# EAGLE board working (EAGLE 6.4)
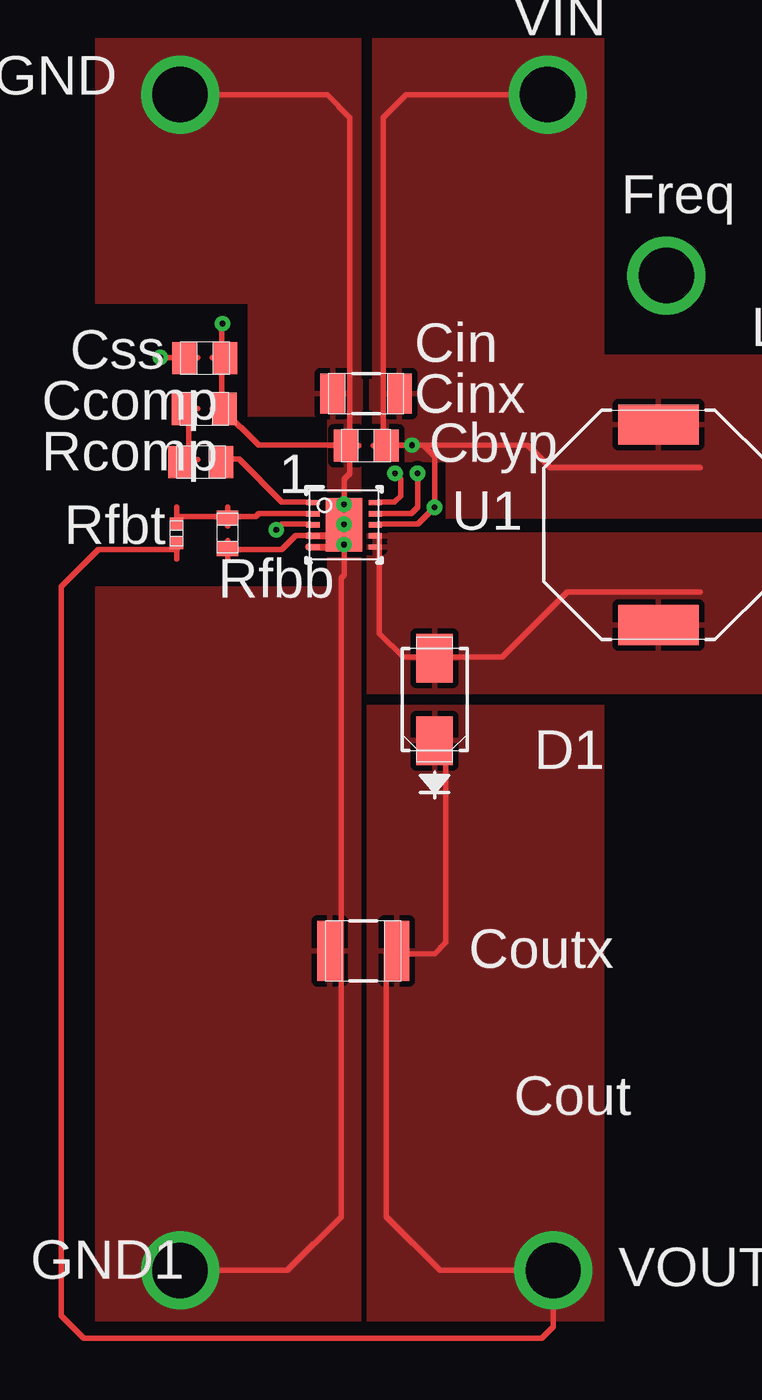
[diagram p0: board, top side]
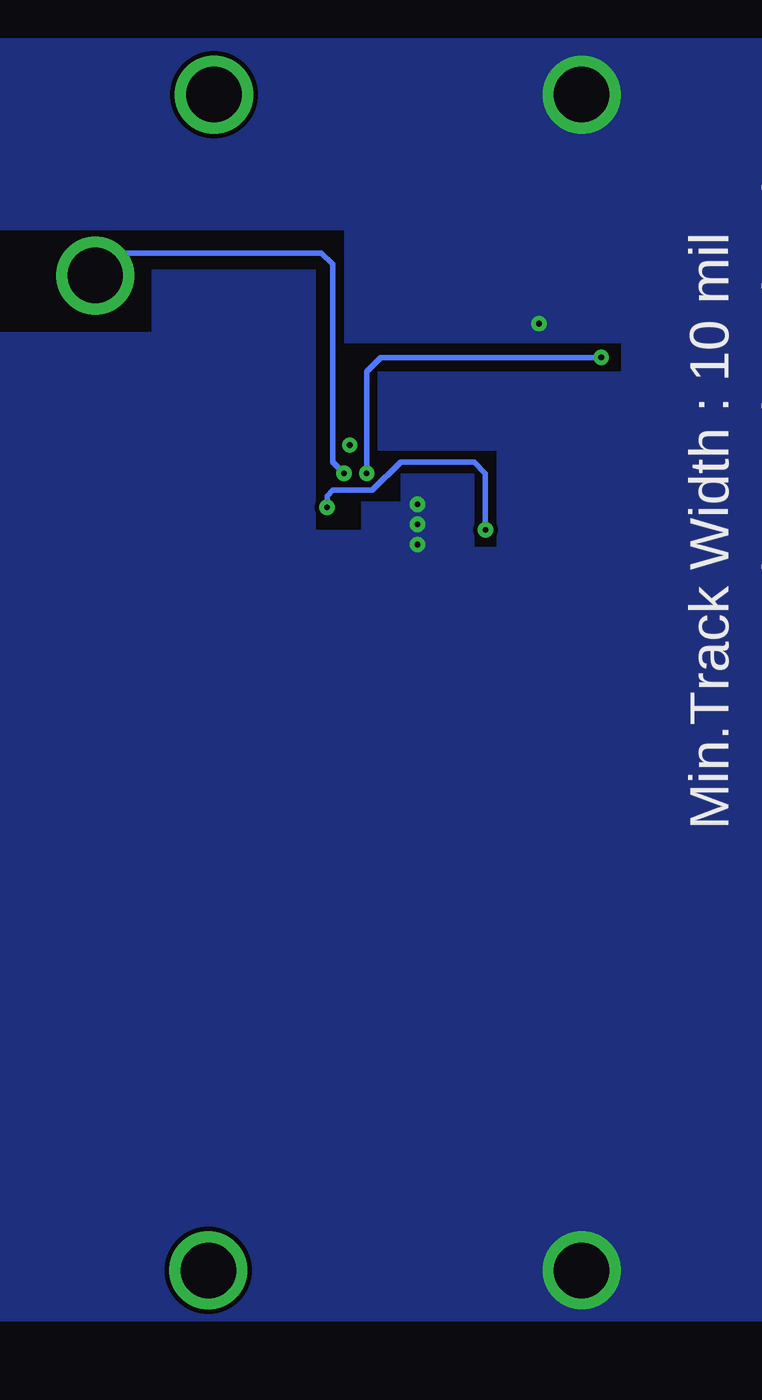
[diagram p1: board, bottom side, seen from below]

No outline drawn. Coordinates in mm, seen from the top.
Copper layers ((1*2)+(15*16)): TOP / INTERNAL1 / layer 15 / BOTTOM

## Footprints (pad centres in the part's own frame; a part is rotated, then mirrored left to right if it is on the bottom)
0805 = smd 1.118 x 1.448: 1 -0.902,0; 2 0.902,0
1206 = smd 1.118 x 1.803: 1 -1.499,0; 2 1.499,0
1210 = smd 1.118 x 2.692: 1 -1.499,0; 2 1.499,0
SMA = smd 2.184 x 1.626: 1 -1.854,0; 2 1.854,0
TP-1502 = drill 0.813 round: 1 0,0
SRU1048 = smd 1.803 x 3.607: 1 -4.496,0; 2 4.496,0
0603 = smd 0.66 x 0.965: 1 -0.699,0; 2 0.699,0
0402 = smd 0.559 x 0.61: 1 -0.419,0; 2 0.419,0
DRC0010A = smd 0.6 x 0.24: 1 -1.4,1; 2 -1.4,0.5; 3 -1.4,0; 4 -1.4,-0.5; 5 -1.4,-1; 6 1.4,-1; 7 1.4,-0.5; 8 1.4,0; 9 1.4,0.5; 10 1.4,1 | smd 1.65 x 2.4: 11 0,0

## Placement (x,y rotation side)
Cbyp  [0805]  45.19,66.01 180 top
Ccomp  [0805]  37.92,67.67 0 top
Cin  [1206]  45.19,68.35 180 top
Cout  [1210]  45.06,43.31 180 top
Css  [0805]  37.95,69.95 0 top
D1  [SMA]  48.26,54.61 90 top
Freq  [TP-1502]  58.65,73.63 0 top
GND  [TP-1502]  36.78,81.76 0 top
GND1  [TP-1502]  36.78,28.91 0 top
L1  [SRU1048]  58.32,62.46 270 top
Rcomp  [0805]  37.77,65.28 180 top
Rfbb  [0603]  38.96,62.08 270 top
Rfbt  [0402]  36.68,62.08 90 top
U1  [DRC0010A]  44.2,62.46 0 top
VIN  [TP-1502]  53.31,81.76 0 top
VOUT  [TP-1502]  53.54,28.91 0 top

## Library data of the parts
Cbyp = ultra-librarian; RefDes: Cbyp; Type: GRM21BR61C105KA01L
Ccomp = ultra-librarian; RefDes: Ccomp; Type: CC0805KRX7R9BB821
Cin = ultra-librarian; RefDes: Cin; Type: GRM31CR61A226KE19L
Cout = ultra-librarian; RefDes: Cout; Type: GRM32ER61C476ME15L
Css = ultra-librarian; RefDes: Css; Type: 08053C104KAT2A
D1 = ultra-librarian; RefDes: D1; Type: B340LA-13-F
Freq = ultra-librarian; RefDes: Freq; Type: TP-1502
GND = ultra-librarian; RefDes: GND; Type: TP-1502
GND1 = ultra-librarian; RefDes: GND1; Type: TP-1502
L1 = ultra-librarian; RefDes: L1; Type: SRU1048-4R7Y
Rcomp = ultra-librarian; RefDes: Rcomp; Type: ERJ-6ENF5762V
Rfbb = ultra-librarian; RefDes: Rfbb; Type: RC0603FR-0739KL
Rfbt = ultra-librarian; RefDes: Rfbt; Type: CRCW0402150KFKED
U1 = ultra-librarian; RefDes: U1; Type: TPS61087QDRCRQ1
VIN = ultra-librarian; RefDes: VIN; Type: TP-1502
VOUT = ultra-librarian; RefDes: VOUT; Type: TP-1502

## Nets
0: Cbyp.2 Ccomp.2 Cin.2 Cout.2 Css.2 GND1.1 GND.1 Rfbb.2 U1.4 U1.5 U1.11
1: Cbyp.1 Cin.1 L1.1 U1.3 U1.8 VIN.1
2: Cout.1 D1.1 Rfbt.1 VOUT.1
4: D1.2 L1.2 U1.6 U1.7
5: Rcomp.1 U1.1
6: Rfbb.1 Rfbt.2 U1.2
7: Ccomp.1 Rcomp.2
13: Freq.1 U1.9
14: Css.1 U1.10

## Tracks (layer width: path | path; a pad name or v marks a point on that pad's centre or on a via)
0  (via drill 0.25 pad 0.69, 2.49 pad 3.48)
  TOP 0.254: v44.2,61.57 44.2,60.2 44.07,60.07 44.07,43.18 44.07,36.45 44.07,31.37 41.66,28.96 v36.83,28.96 | 42.6,61.98 42.04,61.98 41.4,61.34 38.99,61.34 | 38.71,71.48 38.71,69.98 38.71,67.69 40.36,66.04 44.45,66.04 | v44.2,63.37 44.2,64.52 44.45,64.77 44.45,66.04 | v36.83,81.79 43.43,81.79 44.45,80.75 44.45,70.61 44.45,68.33 44.45,66.04 | 44.02,66.03 44.86,66.03 | 38.28,69.96 39.12,69.96 | 38.28,67.68 39.12,67.68 | 38.98,60.91 38.98,61.75
  TOP 0.305: 42.6,61.98 43.76,61.98 v44.2,61.57 44.09,61.47 42.6,61.47
  other vias: 38.73,71.5 44.2,62.48
  pour TOP (rank 5): 44.96,63.75 44.65,63.75 44.65,64.03 44.35,64.03 44.35,63.75 44.04,63.75 44.04,64.03 43.74,64.03 43.74,63.75 43.43,63.75 43.43,61.21 43.74,61.21 43.74,60.93 44.07,60.93 44.07,61.21 44.37,61.21 44.37,60.93 44.65,60.93 44.65,61.21 44.96,61.21
  pour TOP (rank 6): 43.84,67.61 43.84,69.01 45.03,69.01 45.03,67.61
  pour TOP: 44.96,26.67 44.96,84.33 33.02,84.33 33.02,72.39 39.88,72.39 39.88,67.31 43.43,67.31 43.43,59.69 33.02,59.69 33.02,26.67
  pour BOTTOM: 27.18,84.33 66.55,84.33 66.55,75.69 47.5,75.69 47.5,70.61 35.05,70.61 35.05,69.34 45.97,69.34 45.97,65.79 40.64,65.79 40.64,61.47 41.66,61.47 41.66,64.77 44.96,64.77 44.96,63.5 46.74,63.5 46.74,62.23 48.77,62.23 48.77,73.91 56.13,73.91 56.13,71.12 66.55,71.12 66.55,26.67 27.18,26.67
1  (via drill 0.25 pad 0.69, 2.49 pad 3.48)
  TOP 0.254: v47.24,66.04 47.75,66.04 48.26,65.53 v48.26,63.25 47.5,62.48 45.77,62.48 | v41.15,62.23 41.4,62.48 42.6,62.48 | 60.2,65.02 53.47,65.02 52.45,66.04 45.95,66.04 45.95,68.33 45.95,70.61 45.95,80.75 46.99,81.79 v53.34,81.79 | 45.52,66.03 46.35,66.03
  BOTTOM 0.254: v48.26,63.25 48.26,63.75 48.01,64.01 46.23,64.01 44.96,65.28 41.66,65.28 41.15,64.77 v41.15,62.23
  pour TOP: 45.34,67.61 45.34,69.01 46.53,69.01 46.53,67.61
  pour TOP (rank 3): 48.77,62.74 66.55,62.74 66.55,70.1 55.88,70.1 55.88,84.33 45.47,84.33 45.47,65.28 48.77,65.28
2  (via drill 2.49 pad 3.48)
  TOP 0.254: 48.77,52.2 48.77,43.69 48.26,43.18 46.1,43.18 46.1,36.45 46.1,31.37 48.51,28.96 v53.59,28.96 53.59,26.42 53.09,25.91 32.51,25.91 31.5,26.92 31.5,59.69 33.15,61.34 36.7,61.34 | 36.69,60.91 36.69,61.75
  pour TOP (rank 2): 55.88,26.67 55.88,54.36 45.21,54.36 45.21,26.67
4
  TOP 0.254: 60.2,59.44 54.23,59.44 51.31,56.52 48.77,56.52 46.86,56.52 45.77,57.58 45.77,61.47 45.77,61.98
  pour TOP (rank 4): 45.21,54.86 66.55,54.86 66.55,62.1 45.21,62.1
5
  TOP 0.254: 38.71,65.41 39.5,65.41 41.4,63.48 42.6,63.48 | 38.28,65.39 39.12,65.39
6
  TOP 0.254: 42.6,62.97 40.36,62.97 40.23,62.84 36.7,62.84 | 36.69,62.41 36.69,63.25 | 38.98,62.41 38.98,63.25
7
  TOP 0.254: 37.21,65.41 37.21,67.69 | 36.78,67.68 37.62,67.68 | 36.78,65.39 37.62,65.39
13  (via drill 0.25 pad 0.69, 2.49 pad 3.48)
  TOP 0.254: v47.5,64.77 47.5,63.25 47.22,62.97 45.77,62.97
  BOTTOM 0.254: v58.67,73.66 57.66,74.68 48.51,74.68 48.01,74.17 48.01,65.28 v47.5,64.77
14  (via drill 0.25 pad 0.69)
  TOP 0.254: v46.48,64.77 46.74,64.52 46.74,63.75 46.46,63.48 45.77,63.48 | v35.94,69.98 37.21,69.98 | 36.78,69.96 37.62,69.96
  BOTTOM 0.254: v35.94,69.98 45.85,69.98 46.48,69.34 v46.48,64.77

## Text on the board
tDocu: Cinx | 1 | Coutx
bPlace: Design Rule: Min.Clearance: 10 mil | Min.Track Width : 10 mil